# EAGLE board multimax_v1 (EAGLE 6.0)
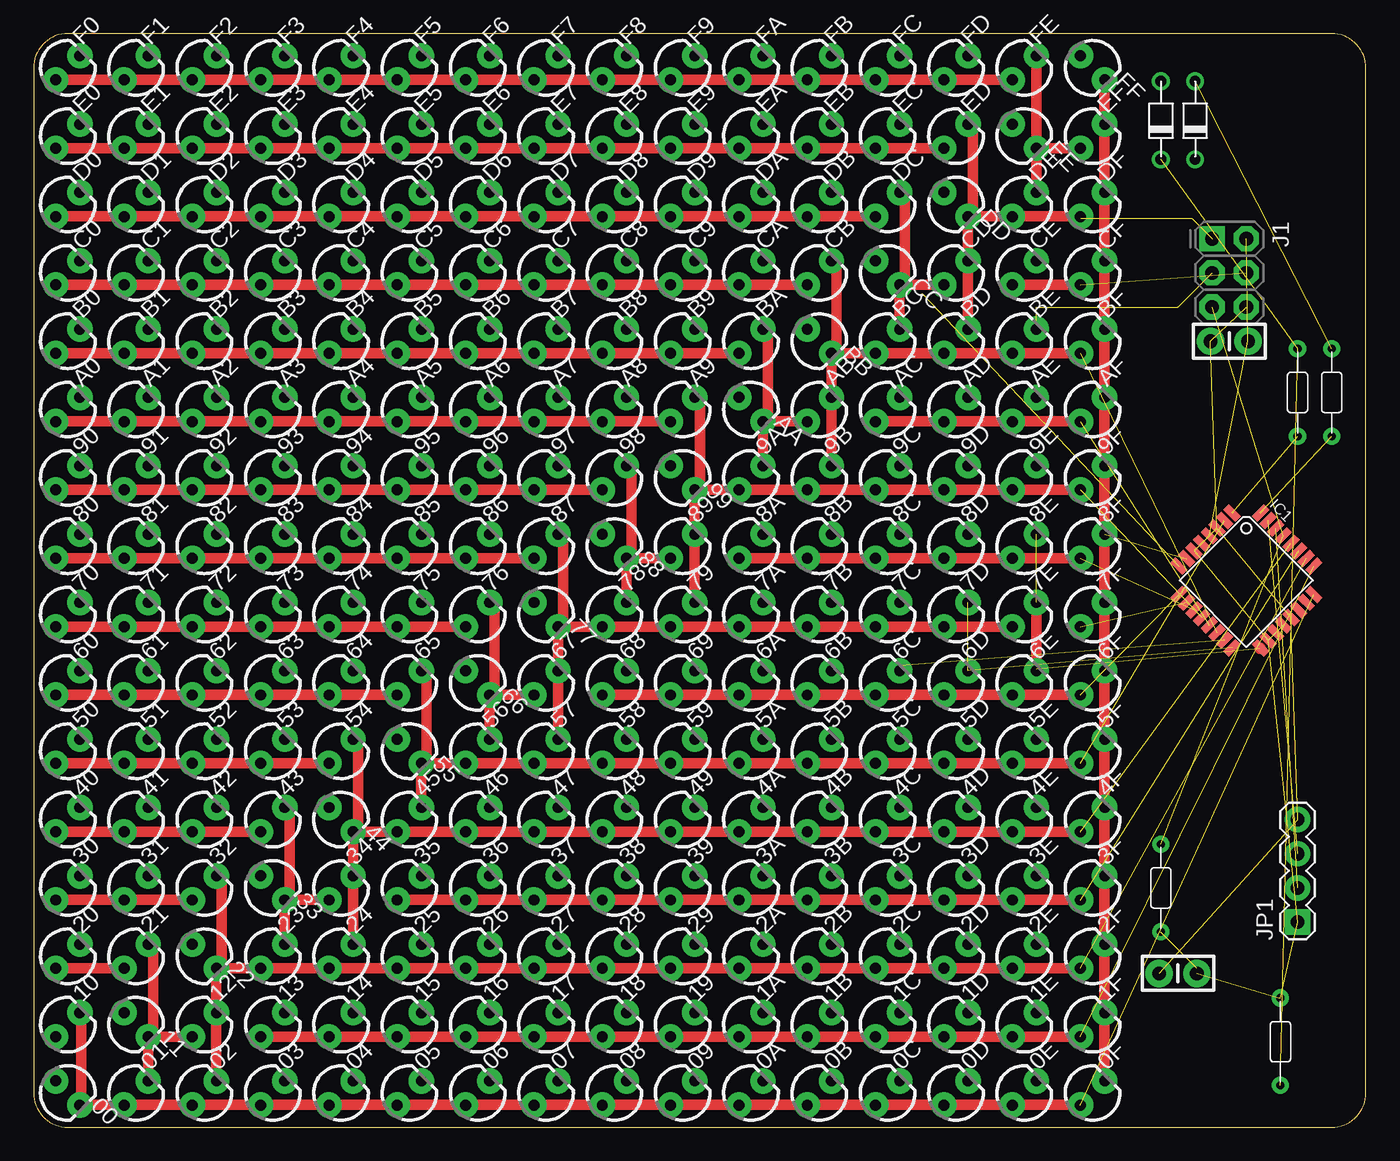
[diagram p0: board, top side]
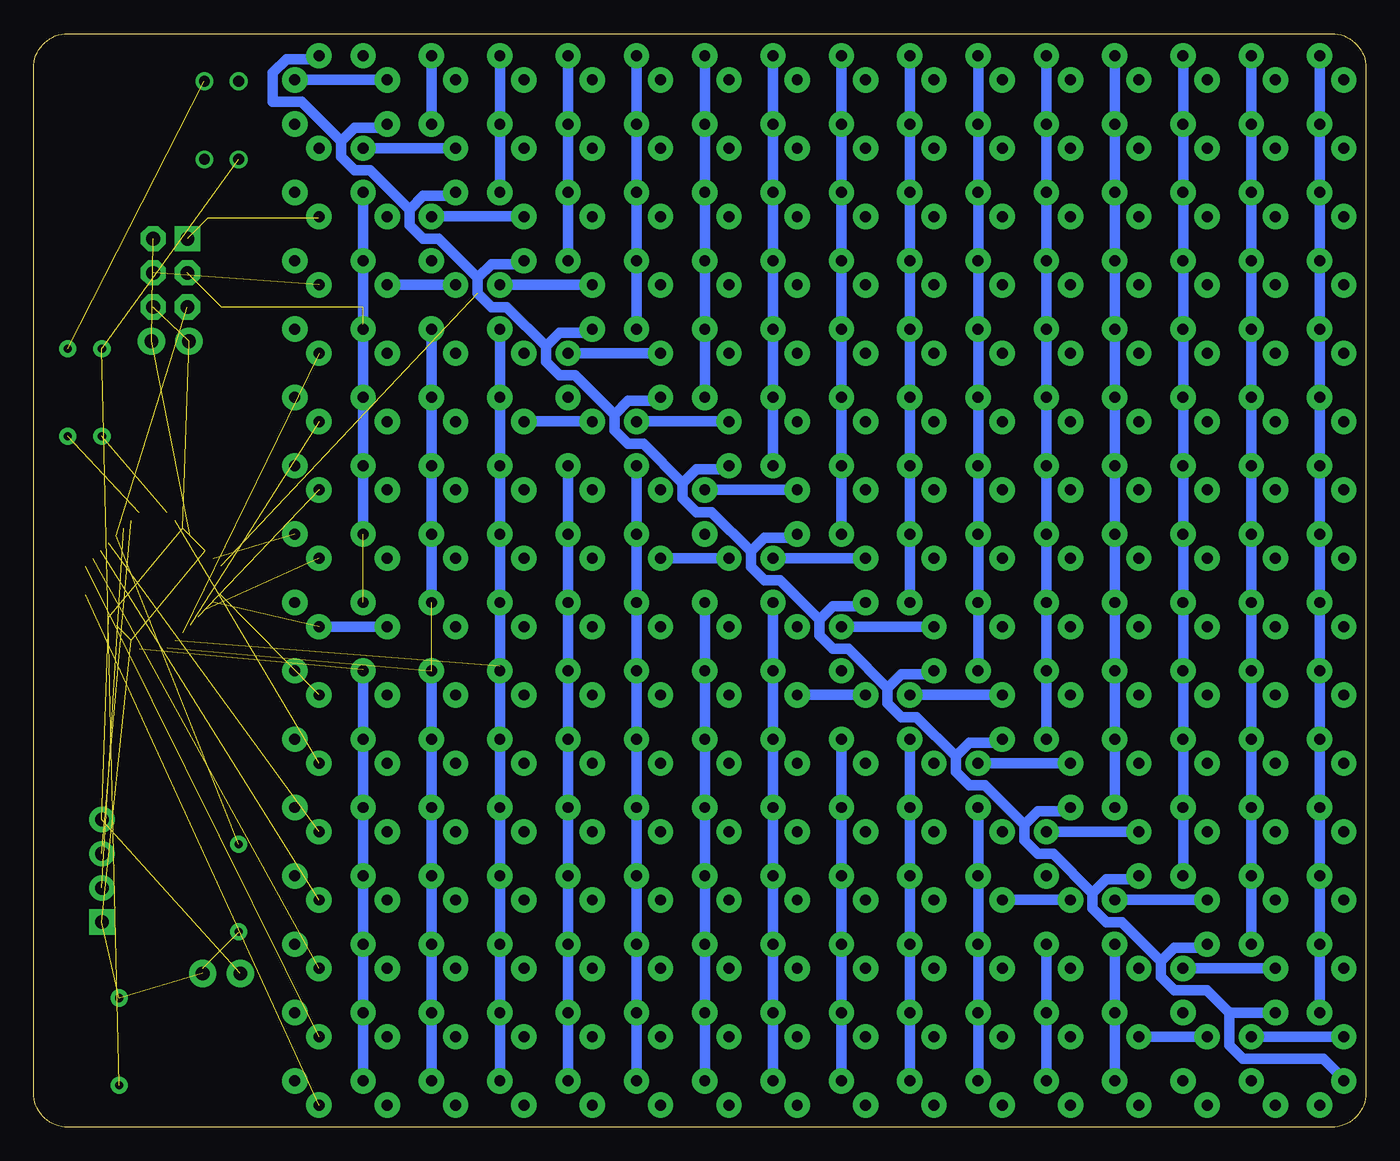
[diagram p1: board, bottom side, seen from below]

Size 99.06 x 81.28 mm. Coordinates in mm from the lower left corner, seen from the top.
Outline: 96.52,81.28 2.54,81.28 arc90 0,78.74 0,2.54 arc90 2.54,0 96.52,0 arc90 99.06,2.54 99.06,78.74 arc90 96.52,81.28
Copper layers (1*16): Top 0.035mm / dielectric 1.5mm / Bottom 0.035mm
Design rules: minimum track width 30mil, minimum drill 24mil, track to track 8mil, track to pad 8mil, pad to pad 8mil, via to via 8mil, smd to smd 8mil, copper to edge 40mil, drill to drill 8mil, minimum pad ring 10mil, minimum via ring 8mil, stop-mask expansion 4mil, vias tented up to drill 0mil, thermal gap 10mil

## Footprints (pad centres in the part's own frame; a part is rotated, then mirrored left to right if it is on the bottom)
LED3MM = drill 0.813 pad 1.88: A -1.27,0; K 1.27,0
CAP-PTH-SMALL-KIT = drill 1.016 pad 2.032: 1 -1.397,0; 2 1.397,0
TQFP32-08 = smd 1.27 x 0.559: 1 -4.293,2.8; 2 -4.293,2; 3 -4.293,1.2; 4 -4.293,0.4; 5 -4.293,-0.4; 6 -4.293,-1.2; 7 -4.293,-2; 8 -4.293,-2.8; 17 4.293,-2.8; 18 4.293,-2; 19 4.293,-1.2; 20 4.293,-0.4; 21 4.293,0.4; 22 4.293,1.2; 23 4.293,2; 24 4.293,2.8 | smd 0.559 x 1.27: 9 -2.8,-4.293; 10 -2,-4.293; 11 -1.2,-4.293; 12 -0.4,-4.293; 13 0.4,-4.293; 14 1.2,-4.293; 15 2,-4.293; 16 2.8,-4.293; 25 2.8,4.293; 26 2,4.293; 27 1.2,4.293; 28 0.4,4.293; 29 -0.4,4.293; 30 -1.2,4.293; 31 -2,4.293; 32 -2.8,4.293
2X3-NS = drill 1.016 pad 1.88 square: 1 -2.54,-1.27 | drill 1.016 pad 1.88 octagon: 2 -2.54,1.27; 3 0,-1.27; 4 0,1.27; 5 2.54,-1.27; 6 2.54,1.27
1X04 = drill 1.016 pad 1.88 square: 1 0,0 | drill 1.016 pad 1.88: 2 2.54,0; 3 5.08,0; 4 7.62,0
R-7 = drill 0.6 pad 1.27: P$1 -3.25,0; P$2 3.25,0
D-7.5 = drill 0.813: A 2.81,0; C -3,0

## Placement (x,y rotation side)
00  [LED3MM]  2.54,2.54 315 top
0A  [LED3MM]  53.34,2.54 45 top
0B  [LED3MM]  58.42,2.54 45 top
0C  [LED3MM]  63.5,2.54 45 top
0D  [LED3MM]  68.58,2.54 45 top
0E  [LED3MM]  73.66,2.54 45 top
0F  [LED3MM]  78.74,2.54 45 top
01  [LED3MM]  7.62,2.54 45 top
1A  [LED3MM]  53.34,7.62 45 top
1B  [LED3MM]  58.42,7.62 45 top
1C  [LED3MM]  63.5,7.62 45 top
1D  [LED3MM]  68.58,7.62 45 top
1E  [LED3MM]  73.66,7.62 45 top
1F  [LED3MM]  78.74,7.62 45 top
02  [LED3MM]  12.7,2.54 45 top
2A  [LED3MM]  53.34,12.7 45 top
2B  [LED3MM]  58.42,12.7 45 top
2C  [LED3MM]  63.5,12.7 45 top
2D  [LED3MM]  68.58,12.7 45 top
2E  [LED3MM]  73.66,12.7 45 top
2F  [LED3MM]  78.74,12.7 45 top
03  [LED3MM]  17.78,2.54 45 top
3A  [LED3MM]  53.34,17.78 45 top
3B  [LED3MM]  58.42,17.78 45 top
3C  [LED3MM]  63.5,17.78 45 top
3D  [LED3MM]  68.58,17.78 45 top
3E  [LED3MM]  73.66,17.78 45 top
3F  [LED3MM]  78.74,17.78 45 top
04  [LED3MM]  22.86,2.54 45 top
4A  [LED3MM]  53.34,22.86 45 top
4B  [LED3MM]  58.42,22.86 45 top
4C  [LED3MM]  63.5,22.86 45 top
4D  [LED3MM]  68.58,22.86 45 top
4E  [LED3MM]  73.66,22.86 45 top
4F  [LED3MM]  78.74,22.86 45 top
05  [LED3MM]  27.94,2.54 45 top
5A  [LED3MM]  53.34,27.94 45 top
5B  [LED3MM]  58.42,27.94 45 top
5C  [LED3MM]  63.5,27.94 45 top
5D  [LED3MM]  68.58,27.94 45 top
5E  [LED3MM]  73.66,27.94 45 top
5F  [LED3MM]  78.74,27.94 45 top
06  [LED3MM]  33.02,2.54 45 top
6A  [LED3MM]  53.34,33.02 45 top
6B  [LED3MM]  58.42,33.02 45 top
6C  [LED3MM]  63.5,33.02 45 top
6D  [LED3MM]  68.58,33.02 45 top
6E  [LED3MM]  73.66,33.02 45 top
6F  [LED3MM]  78.74,33.02 45 top
07  [LED3MM]  38.1,2.54 45 top
7A  [LED3MM]  53.34,38.1 45 top
7B  [LED3MM]  58.42,38.1 45 top
7C  [LED3MM]  63.5,38.1 45 top
7D  [LED3MM]  68.58,38.1 45 top
7E  [LED3MM]  73.66,38.1 45 top
7F  [LED3MM]  78.74,38.1 45 top
08  [LED3MM]  43.18,2.54 45 top
8A  [LED3MM]  53.34,43.18 45 top
8B  [LED3MM]  58.42,43.18 45 top
8C  [LED3MM]  63.5,43.18 45 top
8D  [LED3MM]  68.58,43.18 45 top
8E  [LED3MM]  73.66,43.18 45 top
8F  [LED3MM]  78.74,43.18 45 top
09  [LED3MM]  48.26,2.54 45 top
9A  [LED3MM]  53.34,48.26 45 top
9B  [LED3MM]  58.42,48.26 45 top
9C  [LED3MM]  63.5,48.26 45 top
9D  [LED3MM]  68.58,48.26 45 top
9E  [LED3MM]  73.66,48.26 45 top
9F  [LED3MM]  78.74,48.26 45 top
10  [LED3MM]  2.54,7.62 45 top
11  [LED3MM]  7.62,7.62 315 top
12  [LED3MM]  12.7,7.62 45 top
13  [LED3MM]  17.78,7.62 45 top
14  [LED3MM]  22.86,7.62 45 top
15  [LED3MM]  27.94,7.62 45 top
16  [LED3MM]  33.02,7.62 45 top
17  [LED3MM]  38.1,7.62 45 top
18  [LED3MM]  43.18,7.62 45 top
19  [LED3MM]  48.26,7.62 45 top
20  [LED3MM]  2.54,12.7 45 top
21  [LED3MM]  7.62,12.7 45 top
22  [LED3MM]  12.7,12.7 315 top
23  [LED3MM]  17.78,12.7 45 top
24  [LED3MM]  22.86,12.7 45 top
25  [LED3MM]  27.94,12.7 45 top
26  [LED3MM]  33.02,12.7 45 top
27  [LED3MM]  38.1,12.7 45 top
28  [LED3MM]  43.18,12.7 45 top
29  [LED3MM]  48.26,12.7 45 top
30  [LED3MM]  2.54,17.78 45 top
31  [LED3MM]  7.62,17.78 45 top
32  [LED3MM]  12.7,17.78 45 top
33  [LED3MM]  17.78,17.78 315 top
34  [LED3MM]  22.86,17.78 45 top
35  [LED3MM]  27.94,17.78 45 top
36  [LED3MM]  33.02,17.78 45 top
37  [LED3MM]  38.1,17.78 45 top
38  [LED3MM]  43.18,17.78 45 top
39  [LED3MM]  48.26,17.78 45 top
40  [LED3MM]  2.54,22.86 45 top
41  [LED3MM]  7.62,22.86 45 top
42  [LED3MM]  12.7,22.86 45 top
43  [LED3MM]  17.78,22.86 45 top
44  [LED3MM]  22.86,22.86 315 top
45  [LED3MM]  27.94,22.86 45 top
46  [LED3MM]  33.02,22.86 45 top
47  [LED3MM]  38.1,22.86 45 top
48  [LED3MM]  43.18,22.86 45 top
49  [LED3MM]  48.26,22.86 45 top
50  [LED3MM]  2.54,27.94 45 top
51  [LED3MM]  7.62,27.94 45 top
52  [LED3MM]  12.7,27.94 45 top
53  [LED3MM]  17.78,27.94 45 top
54  [LED3MM]  22.86,27.94 45 top
55  [LED3MM]  27.94,27.94 315 top
56  [LED3MM]  33.02,27.94 45 top
57  [LED3MM]  38.1,27.94 45 top
58  [LED3MM]  43.18,27.94 45 top
59  [LED3MM]  48.26,27.94 45 top
60  [LED3MM]  2.54,33.02 45 top
61  [LED3MM]  7.62,33.02 45 top
62  [LED3MM]  12.7,33.02 45 top
63  [LED3MM]  17.78,33.02 45 top
64  [LED3MM]  22.86,33.02 45 top
65  [LED3MM]  27.94,33.02 45 top
66  [LED3MM]  33.02,33.02 315 top
67  [LED3MM]  38.1,33.02 45 top
68  [LED3MM]  43.18,33.02 45 top
69  [LED3MM]  48.26,33.02 45 top
70  [LED3MM]  2.54,38.1 45 top
71  [LED3MM]  7.62,38.1 45 top
72  [LED3MM]  12.7,38.1 45 top
73  [LED3MM]  17.78,38.1 45 top
74  [LED3MM]  22.86,38.1 45 top
75  [LED3MM]  27.94,38.1 45 top
76  [LED3MM]  33.02,38.1 45 top
77  [LED3MM]  38.1,38.1 315 top
78  [LED3MM]  43.18,38.1 45 top
79  [LED3MM]  48.26,38.1 45 top
80  [LED3MM]  2.54,43.18 45 top
81  [LED3MM]  7.62,43.18 45 top
82  [LED3MM]  12.7,43.18 45 top
83  [LED3MM]  17.78,43.18 45 top
84  [LED3MM]  22.86,43.18 45 top
85  [LED3MM]  27.94,43.18 45 top
86  [LED3MM]  33.02,43.18 45 top
87  [LED3MM]  38.1,43.18 45 top
88  [LED3MM]  43.18,43.18 315 top
89  [LED3MM]  48.26,43.18 45 top
90  [LED3MM]  2.54,48.26 45 top
91  [LED3MM]  7.62,48.26 45 top
92  [LED3MM]  12.7,48.26 45 top
93  [LED3MM]  17.78,48.26 45 top
94  [LED3MM]  22.86,48.26 45 top
95  [LED3MM]  27.94,48.26 45 top
96  [LED3MM]  33.02,48.26 45 top
97  [LED3MM]  38.1,48.26 45 top
98  [LED3MM]  43.18,48.26 45 top
99  [LED3MM]  48.26,48.26 315 top
A0  [LED3MM]  2.54,53.34 45 top
A1  [LED3MM]  7.62,53.34 45 top
A2  [LED3MM]  12.7,53.34 45 top
A3  [LED3MM]  17.78,53.34 45 top
A4  [LED3MM]  22.86,53.34 45 top
A5  [LED3MM]  27.94,53.34 45 top
A6  [LED3MM]  33.02,53.34 45 top
A7  [LED3MM]  38.1,53.34 45 top
A8  [LED3MM]  43.18,53.34 45 top
A9  [LED3MM]  48.26,53.34 45 top
AA  [LED3MM]  53.34,53.34 315 top
AB  [LED3MM]  58.42,53.34 45 top
AC  [LED3MM]  63.5,53.34 45 top
AD  [LED3MM]  68.58,53.34 45 top
AE  [LED3MM]  73.66,53.34 45 top
AF  [LED3MM]  78.74,53.34 45 top
B0  [LED3MM]  2.54,58.42 45 top
B1  [LED3MM]  7.62,58.42 45 top
B2  [LED3MM]  12.7,58.42 45 top
B3  [LED3MM]  17.78,58.42 45 top
B4  [LED3MM]  22.86,58.42 45 top
B5  [LED3MM]  27.94,58.42 45 top
B6  [LED3MM]  33.02,58.42 45 top
B7  [LED3MM]  38.1,58.42 45 top
B8  [LED3MM]  43.18,58.42 45 top
B9  [LED3MM]  48.26,58.42 45 top
BA  [LED3MM]  53.34,58.42 45 top
BB  [LED3MM]  58.42,58.42 315 top
BC  [LED3MM]  63.5,58.42 45 top
BD  [LED3MM]  68.58,58.42 45 top
BE  [LED3MM]  73.66,58.42 45 top
BF  [LED3MM]  78.74,58.42 45 top
C0  [LED3MM]  2.54,63.5 45 top
C1  [LED3MM]  7.62,63.5 45 top
C2  [LED3MM]  12.7,63.5 45 top
C3  [LED3MM]  17.78,63.5 45 top
C4  [LED3MM]  22.86,63.5 45 top
C5  [LED3MM]  27.94,63.5 45 top
C6  [LED3MM]  33.02,63.5 45 top
C7  [LED3MM]  38.1,63.5 45 top
C8  [LED3MM]  43.18,63.5 45 top
C9  [LED3MM]  48.26,63.5 45 top
CA  [LED3MM]  53.34,63.5 45 top
CB  [LED3MM]  58.42,63.5 45 top
CC  [LED3MM]  63.5,63.5 315 top
CD  [LED3MM]  68.58,63.5 45 top
CE  [LED3MM]  73.66,63.5 45 top
CF  [LED3MM]  78.74,63.5 45 top
CP2  [CAP-PTH-SMALL-KIT]  85.09,11.43 180 top
CP4  [CAP-PTH-SMALL-KIT]  88.9,58.42 180 top
D0  [LED3MM]  2.54,68.58 45 top
D1  [LED3MM]  7.62,68.58 45 top
D2  [LED3MM]  12.7,68.58 45 top
D3  [LED3MM]  17.78,68.58 45 top
D4  [LED3MM]  22.86,68.58 45 top
D5  [LED3MM]  27.94,68.58 45 top
D6  [LED3MM]  33.02,68.58 45 top
D7  [LED3MM]  38.1,68.58 45 top
D8  [LED3MM]  43.18,68.58 45 top
D9  [LED3MM]  48.26,68.58 45 top
DA  [LED3MM]  53.34,68.58 45 top
DB  [LED3MM]  58.42,68.58 45 top
DC  [LED3MM]  63.5,68.58 45 top
DD  [LED3MM]  68.58,68.58 315 top
DE  [LED3MM]  73.66,68.58 45 top
DF  [LED3MM]  78.74,68.58 45 top
E0  [LED3MM]  2.54,73.66 45 top
E1  [LED3MM]  7.62,73.66 45 top
E2  [LED3MM]  12.7,73.66 45 top
E3  [LED3MM]  17.78,73.66 45 top
E4  [LED3MM]  22.86,73.66 45 top
E5  [LED3MM]  27.94,73.66 45 top
E6  [LED3MM]  33.02,73.66 45 top
E7  [LED3MM]  38.1,73.66 45 top
E8  [LED3MM]  43.18,73.66 45 top
E9  [LED3MM]  48.26,73.66 45 top
EA  [LED3MM]  53.34,73.66 45 top
EB  [LED3MM]  58.42,73.66 45 top
EC  [LED3MM]  63.5,73.66 45 top
ED  [LED3MM]  68.58,73.66 45 top
EE  [LED3MM]  73.66,73.66 315 top
EF  [LED3MM]  78.74,73.66 45 top
F0  [LED3MM]  2.54,78.74 45 top
F1  [LED3MM]  7.62,78.74 45 top
F2  [LED3MM]  12.7,78.74 45 top
F3  [LED3MM]  17.78,78.74 45 top
F4  [LED3MM]  22.86,78.74 45 top
F5  [LED3MM]  27.94,78.74 45 top
F6  [LED3MM]  33.02,78.74 45 top
F7  [LED3MM]  38.1,78.74 45 top
F8  [LED3MM]  43.18,78.74 45 top
F9  [LED3MM]  48.26,78.74 45 top
FA  [LED3MM]  53.34,78.74 45 top
FB  [LED3MM]  58.42,78.74 45 top
FC  [LED3MM]  63.5,78.74 45 top
FD  [LED3MM]  68.58,78.74 45 top
FE  [LED3MM]  73.66,78.74 45 top
FF  [LED3MM]  78.74,78.74 315 top
IC1  MEGA8-AI  [TQFP32-08]  90.17,40.64 315 top
J1  AVR_SPI_PRG_6NS  [2X3-NS]  88.9,63.5 270 top
JP1  [1X04]  93.98,15.24 90 top
U$2  R-7  [R-7]  83.82,17.78 90 top
U$3  R-7  [R-7]  96.52,54.61 90 top
U$4  R-7  [R-7]  93.98,54.61 90 top
U$5  D-6  [D-7.5]  86.36,74.93 90 top
U$6  D-6  [D-7.5]  83.82,74.93 90 top
U$7  R-7  [R-7]  92.71,6.35 90 top

## Library data of the parts
00 0A 0B 0C 0D 0E 0F 01 1A 1B 1C 1D 1E 1F 02 2A 2B 2C 2D 2E 2F 03 3A 3B 3C 3D 3E 3F 04 4A 4B 4C 4D 4E 4F 05 5A 5B 5C 5D 5E 5F 06 6A 6B 6C 6D 6E 6F 07 7A 7B 7C 7D 7E 7F 08 8A 8B 8C 8D 8E 8F 09 9A 9B 9C 9D 9E 9F 10-99 A0 A1-A9 AA AB AC AD AE AF B0 B1-B9 BA BB BC BD BE BF C0 C1-C9 CA CB CC CD CE CF D0 D1-D9 DA DB DC DD DE DF E0 E1-E9 EA EB EC ED EE EF F0 F1-F9 FA FB FC FD FE FF = SparkFun-LED
CP2 CP4 = SparkFun-Capacitors
IC1 = atmel; MPN: ATMEGA8-16AU; OC_FARNELL: 9171371; OC_NEWARK: 73M8863
J1 JP1 = SparkFun-Connectors
U$2-U$7 = Mrule

## Nets
D: 00.A 11.A 22.A 33.A 44.A 55.A 66.A 77.A 88.A 99.A AA.A BB.A CC.A DD.A EE.A FF.A IC1.8
GND: CP2.2 CP4.2 IC1.3 IC1.5 IC1.21 J1.6 JP1.4
N$1: IC1.31 JP1.3
N$2: IC1.30 JP1.2
N$3: IC1.29 J1.5 U$2.P$2
N$5: 0D.K 1D.K 2D.K 3D.K 4D.K 5D.K 6D.K 7D.K 8D.K 9D.K AD.K BD.K CD.K D0.A D1.A D2.A D3.A D4.A D5.A D6.A D7.A D8.A D9.A DA.A DB.A DC.A DD.K DE.A DF.A ED.K FD.K IC1.16 J1.1
N$8: IC1.1 U$4.P$1
N$9: IC1.32 U$3.P$1
N$10: 0F.K 1F.K 2F.K 3F.K 4F.K 5F.K 6F.K 7F.K 8F.K 9F.K AF.K BF.K CF.K DF.K EF.K F0.A F1.A F2.A F3.A F4.A F5.A F6.A F7.A F8.A F9.A FA.A FB.A FC.A FD.A FE.A FF.K IC1.7
N$11: 0B.K 1B.K 2B.K 3B.K 4B.K 5B.K 6B.K 7B.K 8B.K 9B.K AB.K B0.A B1.A B2.A B3.A B4.A B5.A B6.A B7.A B8.A B9.A BA.A BB.K BC.A BD.A BE.A BF.A CB.K DB.K EB.K FB.K IC1.14
N$13: 09.K 9A.A 9B.A 9C.A 9D.A 9E.A 9F.A 19.K 29.K 39.K 49.K 59.K 69.K 79.K 89.K 90.A 91.A 92.A 93.A 94.A 95.A 96.A 97.A 98.A 99.K A9.K B9.K C9.K D9.K E9.K F9.K IC1.12
N$15: 07.K 7A.A 7B.A 7C.A 7D.A 7E.A 7F.A 17.K 27.K 37.K 47.K 57.K 67.K 70.A 71.A 72.A 73.A 74.A 75.A 76.A 77.K 78.A 79.A 87.K 97.K A7.K B7.K C7.K D7.K E7.K F7.K IC1.10
N$18: 04.K 4A.A 4B.A 4C.A 4D.A 4E.A 4F.A 14.K 24.K 34.K 40.A 41.A 42.A 43.A 44.K 45.A 46.A 47.A 48.A 49.A 54.K 64.K 74.K 84.K 94.K A4.K B4.K C4.K D4.K E4.K F4.K IC1.28
N$20: 02.K 2A.A 2B.A 2C.A 2D.A 2E.A 2F.A 12.K 20.A 21.A 22.K 23.A 24.A 25.A 26.A 27.A 28.A 29.A 32.K 42.K 52.K 62.K 72.K 82.K 92.K A2.K B2.K C2.K D2.K E2.K F2.K IC1.26
N$23: U$5.C
N$24: U$6.A
N$25: U$3.P$2 U$5.A
N$26: U$4.P$2 U$6.C U$7.P$1
S0: 00.K 0A.A 0B.A 0C.A 0D.A 0E.A 0F.A 01.A 02.A 03.A 04.A 05.A 06.A 07.A 08.A 09.A 10.K 20.K 30.K 40.K 50.K 60.K 70.K 80.K 90.K A0.K B0.K C0.K D0.K E0.K F0.K IC1.24
S1: 01.K 1A.A 1B.A 1C.A 1D.A 1E.A 1F.A 10.A 11.K 12.A 13.A 14.A 15.A 16.A 17.A 18.A 19.A 21.K 31.K 41.K 51.K 61.K 71.K 81.K 91.K A1.K B1.K C1.K D1.K E1.K F1.K IC1.25
S3: 03.K 3A.A 3B.A 3C.A 3D.A 3E.A 3F.A 13.K 23.K 30.A 31.A 32.A 33.K 34.A 35.A 36.A 37.A 38.A 39.A 43.K 53.K 63.K 73.K 83.K 93.K A3.K B3.K C3.K D3.K E3.K F3.K IC1.27
S5: 05.K 5A.A 5B.A 5C.A 5D.A 5E.A 5F.A 15.K 25.K 35.K 45.K 50.A 51.A 52.A 53.A 54.A 55.K 56.A 57.A 58.A 59.A 65.K 75.K 85.K 95.K A5.K B5.K C5.K D5.K E5.K F5.K IC1.2
S6: 06.K 6A.A 6B.A 6C.A 6D.A 6E.A 6F.A 16.K 26.K 36.K 46.K 56.K 60.A 61.A 62.A 63.A 64.A 65.A 66.K 67.A 68.A 69.A 76.K 86.K 96.K A6.K B6.K C6.K D6.K E6.K F6.K IC1.9
S8: 08.K 8A.A 8B.A 8C.A 8D.A 8E.A 8F.A 18.K 28.K 38.K 48.K 58.K 68.K 78.K 80.A 81.A 82.A 83.A 84.A 85.A 86.A 87.A 88.K 89.A 98.K A8.K B8.K C8.K D8.K E8.K F8.K IC1.11
S10: 0A.K 1A.K 2A.K 3A.K 4A.K 5A.K 6A.K 7A.K 8A.K 9A.K A0.A A1.A A2.A A3.A A4.A A5.A A6.A A7.A A8.A A9.A AA.K AB.A AC.A AD.A AE.A AF.A BA.K CA.K DA.K EA.K FA.K IC1.13
S12: 0C.K 1C.K 2C.K 3C.K 4C.K 5C.K 6C.K 7C.K 8C.K 9C.K AC.K BC.K C0.A C1.A C2.A C3.A C4.A C5.A C6.A C7.A C8.A C9.A CA.A CB.A CC.K CD.A CE.A CF.A DC.K EC.K FC.K IC1.15 J1.4
S14: 0E.K 1E.K 2E.K 3E.K 4E.K 5E.K 6E.K 7E.K 8E.K 9E.K AE.K BE.K CE.K DE.K E0.A E1.A E2.A E3.A E4.A E5.A E6.A E7.A E8.A E9.A EA.A EB.A EC.A ED.A EE.K EF.A FE.K IC1.17 J1.3
VCC: CP2.1 CP4.1 IC1.4 IC1.6 IC1.18 IC1.20 J1.2 JP1.1 U$2.P$1 U$7.P$2

## Tracks (layer width: path | path; a pad name or v marks a point on that pad's centre or on a via)
D  (1 unrouted)
  Bottom 0.762: 10.16,8.51 10.16,6.1 9.14,5.08 3.17,5.08 1.65,3.56 00.A | 10.16,8.51 11.A | 15.24,12.32 14.22,13.34 12.06,13.34 22.A | 15.24,12.32 15.24,11.18 14.22,10.16 11.81,10.16 10.16,8.51 | 20.32,17.4 19.3,18.41 17.14,18.41 33.A | 20.32,17.4 20.32,16.26 19.3,15.24 18.16,15.24 15.24,12.32 | 25.4,22.48 24.38,23.5 22.23,23.5 21.97,23.75 44.A | 25.4,22.48 25.4,21.34 24.38,20.32 23.24,20.32 20.32,17.4 | 30.48,27.56 29.46,28.57 27.3,28.57 55.A | 30.48,27.56 30.48,26.42 29.46,25.4 28.32,25.4 25.4,22.48 | 35.56,32.64 34.54,33.66 32.38,33.66 32.13,33.91 66.A | 35.56,32.64 35.56,31.5 34.54,30.48 33.4,30.48 30.48,27.56 | 40.64,37.72 39.62,38.73 37.47,38.73 37.21,38.99 77.A | 40.64,37.72 40.64,36.58 39.62,35.56 38.48,35.56 35.56,32.64 | 45.72,42.8 44.7,43.81 42.55,43.81 88.A | 45.72,42.8 45.72,41.66 44.7,40.64 43.56,40.64 40.64,37.72 | 50.8,47.88 49.78,48.9 47.62,48.9 47.37,49.15 99.A | 50.8,47.88 50.8,46.74 49.78,45.72 48.64,45.72 45.72,42.8 | 55.88,52.96 54.86,53.98 52.7,53.98 52.45,54.23 AA.A | 55.88,52.96 55.88,51.82 54.86,50.8 53.72,50.8 50.8,47.88 | 60.96,58.04 59.94,59.05 57.78,59.05 57.53,59.31 BB.A | 60.96,58.04 60.96,56.9 59.94,55.88 58.8,55.88 55.88,52.96 | 66.04,63.12 65.02,64.14 62.87,64.14 62.61,64.39 CC.A | 66.04,63.12 66.04,61.98 65.02,60.96 63.88,60.96 60.96,58.04 | 71.12,68.2 70.1,69.22 67.94,69.22 67.69,69.47 DD.A | 71.12,68.2 71.12,67.06 70.1,66.04 68.96,66.04 66.04,63.12 | 76.2,73.28 75.18,74.3 73.03,74.3 72.77,74.55 EE.A | 76.2,73.28 76.2,72.14 75.18,71.12 74.04,71.12 71.12,68.2 | 76.2,73.28 79.12,76.2 81.28,76.2 81.28,78.36 80.26,79.38 78.11,79.38 FF.A
GND  (6 unrouted)
N$1  (1 unrouted)
N$2  (1 unrouted)
N$3  (2 unrouted)
N$5  (4 unrouted)
  Top 0.762: D0.A 1.65,67.69 6.6,67.69 D1.A 6.99,67.69 11.68,67.69 D2.A 12.06,67.69 16.76,67.69 D3.A 17.14,67.69 21.84,67.69 D4.A 22.23,67.69 26.92,67.69 D5.A 27.3,67.69 32,67.69 D6.A 32.38,67.69 37.08,67.69 D7.A 37.47,67.69 42.16,67.69 D8.A 42.55,67.69 47.24,67.69 D9.A 47.62,67.69 52.32,67.69 DA.A 52.7,67.69 57.4,67.69 DB.A 57.78,67.69 62.48,67.69 DC.A | DD.K 69.47,67.56 69.47,64.52 CD.K 69.47,64.14 69.47,59.44 BD.K | DD.K 69.85,67.69 72.64,67.69 DE.A 73.03,67.69 77.72,67.69 DF.A | ED.K 69.6,74.55 69.85,74.3 69.85,68.07 DD.K
  Bottom 0.762: ED.K 69.47,74.68 69.47,79.63 FD.K | 77.85,67.56 DF.A | 0D.K 69.47,3.56 69.47,8.51 1D.K 69.47,8.89 69.47,13.59 2D.K 69.47,13.97 69.47,18.67 3D.K 69.47,19.05 69.47,23.75 4D.K 69.47,24.13 69.47,28.57 5D.K 69.47,28.96 69.47,33.66 6D.K | 7D.K 69.47,39.37 69.47,44.07 8D.K 69.47,44.45 69.47,49.15 9D.K 69.47,49.53 69.47,54.23 AD.K 69.47,54.61 69.47,59.31 BD.K | DC.A 62.61,67.69 69.47,67.69 DD.K
N$8  (1 unrouted)
N$9  (1 unrouted)
N$10  (1 unrouted)
  Top 0.762: F0.A 1.65,77.85 6.6,77.85 F1.A 6.99,77.85 11.68,77.85 F2.A 12.06,77.85 16.76,77.85 F3.A 17.14,77.85 21.84,77.85 F4.A 22.23,77.85 26.92,77.85 F5.A 27.3,77.85 32,77.85 F6.A 32.38,77.85 37.08,77.85 F7.A 37.47,77.85 42.16,77.85 F8.A 42.55,77.85 47.24,77.85 F9.A 47.62,77.85 52.32,77.85 FA.A 52.7,77.85 57.4,77.85 FB.A 57.78,77.85 62.48,77.85 FC.A 62.87,77.85 67.56,77.85 FD.A 67.94,77.85 72.64,77.85 FE.A | FF.K 79.63,77.72 79.63,74.68 EF.K 79.63,74.3 79.63,69.85 DF.K 79.63,69.47 79.63,64.77 CF.K 79.63,64.39 79.63,59.69 BF.K 79.63,59.31 79.63,54.61 AF.K 79.63,54.23 79.63,49.53 9F.K 79.63,44.45 8F.K 79.63,39.37 7F.K 79.63,38.99 79.63,34.29 6F.K 79.63,33.91 79.63,29.21 5F.K 79.63,24.13 4F.K 79.63,23.75 79.63,19.05 3F.K 79.63,13.97 2F.K 79.63,8.89 1F.K 79.63,3.56 0F.K
  Bottom 0.762: FE.A 72.77,77.85 FF.K
N$11  (1 unrouted)
  Top 0.762: B0.A 1.65,57.53 6.6,57.53 B1.A 6.99,57.53 11.68,57.53 B2.A 12.06,57.53 16.76,57.53 B3.A 17.14,57.53 21.84,57.53 B4.A 22.23,57.53 26.92,57.53 B5.A 27.3,57.53 32,57.53 B6.A 32.38,57.53 37.08,57.53 B7.A 37.47,57.53 42.16,57.53 B8.A 42.55,57.53 47.24,57.53 B9.A 47.62,57.53 52.32,57.53 BA.A | BB.K 59.31,57.4 59.31,54.36 AB.K 59.31,53.98 59.31,49.28 9B.K | BB.K 59.69,57.53 62.48,57.53 BC.A 62.87,57.53 67.56,57.53 BD.A 67.94,57.53 72.64,57.53 BE.A 73.03,57.53 77.72,57.53 BF.A | CB.K 59.44,64.39 59.69,64.14 59.69,57.91 BB.K
  Bottom 0.762: CB.K 59.31,64.52 59.31,69.47 DB.K 59.31,69.85 59.31,74.55 EB.K 59.31,74.93 59.31,79.63 FB.K | 0B.K 59.31,3.56 59.31,8.51 1B.K 59.31,8.89 59.31,13.59 2B.K 59.31,13.97 59.31,18.67 3B.K 59.31,19.05 59.31,23.75 4B.K 59.31,24.13 59.31,28.83 5B.K 59.31,29.21 59.31,33.91 6B.K 59.31,34.29 59.31,38.99 7B.K 59.31,39.37 59.31,44.07 8B.K 59.31,44.45 59.31,49.15 9B.K | BA.A 52.45,57.53 59.31,57.53 BB.K
N$13  (1 unrouted)
  Top 0.762: 90.A 1.65,47.37 6.6,47.37 91.A 6.99,47.37 11.68,47.37 92.A 12.06,47.37 16.76,47.37 93.A 17.14,47.37 21.84,47.37 94.A 22.23,47.37 26.92,47.37 95.A 27.3,47.37 32,47.37 96.A 32.38,47.37 37.08,47.37 97.A 37.47,47.37 42.16,47.37 98.A | 99.K 49.15,47.24 49.15,44.2 89.K 49.15,43.81 49.15,39.12 79.K | 99.K 49.53,47.37 52.32,47.37 9A.A 52.7,47.37 57.4,47.37 9B.A 57.78,47.37 62.48,47.37 9C.A 62.87,47.37 67.56,47.37 9D.A 67.94,47.37 72.64,47.37 9E.A 73.03,47.37 77.72,47.37 9F.A | A9.K 49.28,54.23 49.53,53.98 49.53,47.75 99.K
  Bottom 0.762: 09.K 49.15,3.56 19.K 49.15,8.89 29.K 49.15,13.97 39.K 49.15,19.05 49.15,23.75 49.K 49.15,24.13 59.K 49.15,29.21 49.15,33.91 69.K 49.15,34.29 49.15,38.99 79.K | A9.K 49.15,54.36 49.15,59.31 B9.K 49.15,59.69 49.15,64.39 C9.K 49.15,64.77 49.15,69.47 D9.K 49.15,69.85 E9.K 49.15,74.93 F9.K | 98.A 42.29,47.37 49.15,47.37 99.K
N$15  (1 unrouted)
  Top 0.762: 70.A 1.65,37.21 6.6,37.21 71.A 6.99,37.21 11.68,37.21 72.A 12.06,37.21 16.76,37.21 73.A 17.14,37.21 21.84,37.21 74.A 22.23,37.21 26.92,37.21 75.A 27.3,37.21 32,37.21 76.A | 77.K 38.99,37.08 38.99,34.04 67.K 38.99,33.66 38.99,28.96 57.K | 77.K 39.37,37.21 42.16,37.21 78.A 42.55,37.21 47.24,37.21 79.A 47.62,37.21 52.32,37.21 7A.A 52.7,37.21 57.4,37.21 7B.A 57.78,37.21 62.48,37.21 7C.A 62.87,37.21 67.56,37.21 7D.A 67.94,37.21 72.64,37.21 7E.A | 87.K 39.12,44.07 39.37,43.81 39.37,37.59 77.K
  Bottom 0.762: 87.K 38.99,44.2 38.99,49.15 97.K 38.99,49.53 38.99,54.23 A7.K 38.99,54.61 38.99,59.31 B7.K 38.99,59.69 38.99,64.39 C7.K 38.99,64.77 38.99,69.47 D7.K 38.99,69.85 38.99,74.55 E7.K 38.99,74.93 38.99,79.63 F7.K | 07.K 38.99,3.56 38.99,8.51 17.K 38.99,8.89 38.99,13.59 27.K 38.99,13.97 38.99,18.67 37.K 38.99,19.05 38.99,23.75 47.K 38.99,24.13 38.99,28.83 57.K | 7F.A 77.72,37.21 72.77,37.21 7E.A | 76.A 38.99,37.21 77.K
N$18  (1 unrouted)
  Top 0.762: 40.A 1.65,21.97 6.6,21.97 41.A 6.99,21.97 11.68,21.97 42.A 12.06,21.97 16.76,21.97 43.A | 44.K 23.75,21.84 23.75,18.8 34.K 23.75,18.41 23.75,13.72 24.K | 44.K 24.13,21.97 26.92,21.97 45.A 27.3,21.97 32,21.97 46.A 32.38,21.97 37.08,21.97 47.A 37.47,21.97 42.16,21.97 48.A 42.55,21.97 47.24,21.97 49.A 47.62,21.97 52.32,21.97 4A.A 52.7,21.97 57.4,21.97 4B.A 57.78,21.97 62.48,21.97 4C.A 62.87,21.97 67.56,21.97 4D.A 67.94,21.97 72.64,21.97 4E.A 73.03,21.97 77.72,21.97 4F.A | 54.K 23.88,28.83 24.13,28.57 24.13,22.35 44.K
  Bottom 0.762: 54.K 23.75,28.96 23.75,33.91 64.K 23.75,34.29 23.75,38.99 74.K 23.75,39.37 23.75,44.07 84.K 23.75,44.45 23.75,49.15 94.K 23.75,49.53 23.75,54.23 A4.K 23.75,54.61 23.75,59.31 B4.K 23.75,59.69 23.75,64.39 C4.K 23.75,64.77 23.75,69.47 D4.K 23.75,69.85 23.75,74.55 E4.K 23.75,74.93 23.75,79.63 F4.K | 04.K 23.75,3.56 23.75,8.51 14.K 23.75,8.89 23.75,13.59 24.K | 43.A 44.K
N$20  (1 unrouted)
  Top 0.762: 20.A 1.65,11.81 6.6,11.81 21.A | 02.K 13.59,3.56 12.K 13.59,8.89 13.59,11.68 22.K | 22.K 13.97,11.81 16.76,11.81 23.A 17.14,11.81 21.84,11.81 24.A 22.23,11.81 26.92,11.81 25.A 27.3,11.81 32,11.81 26.A 32.38,11.81 37.08,11.81 27.A 37.47,11.81 42.16,11.81 28.A 42.55,11.81 47.24,11.81 29.A 47.62,11.81 52.32,11.81 2A.A 52.7,11.81 57.4,11.81 2B.A 57.78,11.81 62.48,11.81 2C.A 62.87,11.81 67.56,11.81 2D.A 67.94,11.81 72.64,11.81 2E.A 73.03,11.81 77.72,11.81 2F.A | 32.K 13.72,18.67 13.97,18.41 13.97,12.19 22.K
  Bottom 0.762: 32.K 13.59,18.8 13.59,23.75 42.K 13.59,24.13 52.K 13.59,29.21 13.59,33.91 62.K 13.59,34.29 13.59,38.99 72.K 13.59,39.37 82.K 13.59,44.45 92.K 13.59,49.53 13.59,54.23 A2.K 13.59,54.61 13.59,59.31 B2.K 13.59,59.69 13.59,64.39 C2.K 13.59,64.77 13.59,69.47 D2.K 13.59,69.85 E2.K 13.59,74.93 F2.K | 21.A 22.K
N$25  (1 unrouted)
N$26  (2 unrouted)
S0  (1 unrouted)
  Top 0.762: 0F.A 77.47,1.65 72.77,1.65 0E.A 72.39,1.65 67.94,1.65 0D.A 67.56,1.65 62.87,1.65 0C.A 62.48,1.65 57.78,1.65 0B.A 57.4,1.65 52.7,1.65 0A.A 52.32,1.65 47.62,1.65 09.A 47.24,1.65 42.55,1.65 08.A 42.16,1.65 37.47,1.65 07.A 37.08,1.65 32.38,1.65 06.A 32,1.65 27.3,1.65 05.A 26.92,1.65 22.23,1.65 04.A 21.84,1.65 17.14,1.65 03.A 16.76,1.65 12.06,1.65 02.A 11.68,1.65 6.99,1.65 01.A 6.6,1.65 3.56,1.65 00.K 3.56,2.03 3.56,8.51 10.K
  Bottom 0.762: 10.K 3.43,8.64 3.43,13.59 20.K 3.43,13.97 3.43,18.67 30.K 3.43,19.05 3.43,23.75 40.K 3.43,24.13 3.43,28.83 50.K 3.43,29.21 3.43,33.91 60.K 3.43,34.29 3.43,38.99 70.K 3.43,39.37 3.43,44.07 80.K 3.43,44.45 3.43,49.15 90.K 3.43,49.53 3.43,54.23 A0.K 3.43,54.61 3.43,59.31 B0.K 3.43,59.69 3.43,64.39 C0.K 3.43,64.77 3.43,69.47 D0.K 3.43,69.85 3.43,74.55 E0.K 3.43,74.93 3.43,79.63 F0.K
S1  (1 unrouted)
  Top 0.762: 01.K 8.51,3.56 8.51,6.6 11.K | 12.A 11.68,6.73 8.89,6.73 11.K | 13.A 21.84,6.73 14.A 22.23,6.73 26.92,6.73 15.A 27.3,6.73 32,6.73 16.A 32.38,6.73 37.08,6.73 17.A 37.47,6.73 42.16,6.73 18.A 42.55,6.73 47.24,6.73 19.A 47.62,6.73 52.32,6.73 1A.A 52.7,6.73 57.4,6.73 1B.A 57.78,6.73 62.48,6.73 1C.A 62.87,6.73 67.56,6.73 1D.A 67.94,6.73 72.64,6.73 1E.A 73.03,6.73 77.72,6.73 1F.A | 21.K 8.64,13.59 8.89,13.34 8.89,7.11 11.K
  Bottom 0.762: 21.K 8.51,13.72 31.K 8.51,19.05 8.51,23.75 41.K 8.51,24.13 51.K 8.51,29.21 8.51,33.91 61.K 8.51,34.29 8.51,38.99 71.K 8.51,39.37 81.K 8.51,44.45 91.K 8.51,49.53 8.51,54.23 A1.K 8.51,54.61 8.51,59.31 B1.K 8.51,59.69 8.51,64.39 C1.K 8.51,64.77 8.51,69.47 D1.K 8.51,69.85 E1.K 8.51,74.93 F1.K | 10.A 1.65,6.73 11.K | 12.A 16.76,6.73 13.A
S3  (1 unrouted)
  Top 0.762: 30.A 1.65,16.89 6.6,16.89 31.A 6.99,16.89 11.68,16.89 32.A | 23.K 18.67,13.72 18.67,16.76 33.K | 34.A 21.84,16.89 19.05,16.89 33.K | 35.A 32,16.89 36.A 32.38,16.89 37.08,16.89 37.A 37.47,16.89 42.16,16.89 38.A 42.55,16.89 47.24,16.89 39.A 47.62,16.89 52.32,16.89 3A.A 52.7,16.89 57.4,16.89 3B.A 57.78,16.89 62.48,16.89 3C.A 62.87,16.89 67.56,16.89 3D.A 67.94,16.89 72.64,16.89 3E.A 73.03,16.89 77.72,16.89 3F.A | 43.K 18.8,23.75 19.05,23.5 19.05,17.27 33.K
  Bottom 0.762: 43.K 18.67,23.88 53.K 18.67,29.21 18.67,33.91 63.K 18.67,34.29 18.67,38.99 73.K 18.67,39.37 83.K 18.67,44.45 93.K 18.67,49.53 18.67,54.23 A3.K 18.67,54.61 18.67,59.31 B3.K 18.67,59.69 18.67,64.39 C3.K 18.67,64.77 18.67,69.47 D3.K 18.67,69.85 E3.K 18.67,74.93 F3.K | 03.K 18.67,3.56 13.K 18.67,8.89 23.K | 32.A 33.K | 34.A 26.92,16.89 35.A
S5  (1 unrouted)
  Top 0.762: 50.A 1.65,27.05 6.6,27.05 51.A 6.99,27.05 11.68,27.05 52.A 12.06,27.05 16.76,27.05 53.A 17.14,27.05 21.84,27.05 54.A | 45.K 28.83,23.88 28.83,26.92 55.K | 55.K 29.21,27.05 32,27.05 56.A 32.38,27.05 37.08,27.05 57.A 37.47,27.05 42.16,27.05 58.A 42.55,27.05 47.24,27.05 59.A 47.62,27.05 52.32,27.05 5A.A 52.7,27.05 57.4,27.05 5B.A 57.78,27.05 62.48,27.05 5C.A 62.87,27.05 67.56,27.05 5D.A 67.94,27.05 72.64,27.05 5E.A 73.03,27.05 77.72,27.05 5F.A | 65.K 28.96,33.91 29.21,33.66 29.21,27.43 55.K
  Bottom 0.762: 65.K 28.83,34.04 28.83,38.99 75.K 28.83,39.37 85.K 28.83,44.45 95.K 28.83,49.53 28.83,54.23 A5.K 28.83,54.61 28.83,59.31 B5.K 28.83,59.69 28.83,64.39 C5.K 28.83,64.77 28.83,69.47 D5.K 28.83,69.85 E5.K 28.83,74.93 F5.K | 05.K 28.83,3.56 15.K 28.83,8.89 25.K 28.83,13.97 35.K 28.83,19.05 28.83,23.75 45.K | 54.A 55.K
S6  (1 unrouted)
  Top 0.762: 68.A 47.24,32.13 69.A 47.62,32.13 52.32,32.13 6A.A 52.7,32.13 57.4,32.13 6B.A 57.78,32.13 62.48,32.13 6C.A 62.87,32.13 67.56,32.13 6D.A 67.94,32.13 72.64,32.13 6E.A 73.03,32.13 77.72,32.13 6F.A | 60.A 1.65,32.13 6.6,32.13 61.A 6.99,32.13 11.68,32.13 62.A 12.06,32.13 16.76,32.13 63.A 17.14,32.13 21.84,32.13 64.A 22.23,32.13 26.92,32.13 65.A | 56.K 33.91,28.96 33.91,32 66.K | 67.A 37.08,32.13 34.29,32.13 66.K | 76.K 34.04,38.99 34.29,38.73 34.29,32.51 66.K
  Bottom 0.762: 76.K 33.91,39.12 33.91,44.07 86.K 33.91,44.45 33.91,49.15 96.K 33.91,49.53 33.91,54.23 A6.K 33.91,54.61 33.91,59.31 B6.K 33.91,59.69 33.91,64.39 C6.K 33.91,64.77 33.91,69.47 D6.K 33.91,69.85 33.91,74.55 E6.K 33.91,74.93 33.91,79.63 F6.K | 06.K 33.91,3.56 33.91,8.51 16.K 33.91,8.89 33.91,13.59 26.K 33.91,13.97 33.91,18.67 36.K 33.91,19.05 33.91,23.75 46.K 33.91,24.13 33.91,28.83 56.K | 65.A 33.91,32.13 66.K | 68.A 42.16,32.13 67.A
S8  (1 unrouted)
  Top 0.762: 80.A 1.65,42.29 6.6,42.29 81.A 6.99,42.29 11.68,42.29 82.A 12.06,42.29 16.76,42.29 83.A 17.14,42.29 21.84,42.29 84.A 22.23,42.29 26.92,42.29 85.A 27.3,42.29 32,42.29 86.A 32.38,42.29 37.08,42.29 87.A | 8A.A 52.45,42.29 57.4,42.29 8B.A 57.78,42.29 62.48,42.29 8C.A 62.87,42.29 67.56,42.29 8D.A 67.94,42.29 72.64,42.29 8E.A 73.03,42.29 77.72,42.29 8F.A | 78.K 44.07,39.12 44.07,42.16 88.K | 89.A 47.24,42.29 44.45,42.29 88.K | 98.K 44.2,49.15 44.45,48.9 44.45,42.67 88.K
  Bottom 0.762: 98.K 44.07,49.28 44.07,54.23 A8.K 44.07,54.61 44.07,59.31 B8.K 44.07,59.69 44.07,64.39 C8.K 44.07,64.77 44.07,69.47 D8.K 44.07,69.85 E8.K 44.07,74.93 F8.K | 08.K 44.07,3.56 18.K 44.07,8.89 28.K 44.07,13.97 38.K 44.07,19.05 44.07,23.75 48.K 44.07,24.13 58.K 44.07,29.21 44.07,33.91 68.K 44.07,34.29 44.07,38.99 78.K | 8A.A 52.32,42.29 47.37,42.29 89.A | 87.A 88.K
S10  (1 unrouted)
  Top 0.762: A0.A 1.65,52.45 6.6,52.45 A1.A 6.99,52.45 11.68,52.45 A2.A 12.06,52.45 16.76,52.45 A3.A 17.14,52.45 21.84,52.45 A4.A 22.23,52.45 26.92,52.45 A5.A 27.3,52.45 32,52.45 A6.A 32.38,52.45 37.08,52.45 A7.A 37.47,52.45 42.16,52.45 A8.A 42.55,52.45 47.24,52.45 A9.A | AC.A 62.61,52.45 67.56,52.45 AD.A 67.94,52.45 72.64,52.45 AE.A 73.03,52.45 77.72,52.45 AF.A | 9A.K 54.23,49.28 54.23,52.32 AA.K | AB.A 57.4,52.45 54.61,52.45 AA.K | BA.K 54.36,59.31 54.61,59.05 54.61,52.83 AA.K
  Bottom 0.762: BA.K 54.23,59.44 54.23,64.39 CA.K 54.23,64.77 54.23,69.47 DA.K 54.23,69.85 54.23,74.55 EA.K 54.23,74.93 54.23,79.63 FA.K | 0A.K 54.23,3.56 54.23,8.51 1A.K 54.23,8.89 54.23,13.59 2A.K 54.23,13.97 54.23,18.67 3A.K 54.23,19.05 54.23,23.75 4A.K 54.23,24.13 54.23,28.83 5A.K 54.23,29.21 54.23,33.91 6A.K 54.23,34.29 54.23,38.99 7A.K 54.23,39.37 54.23,44.07 8A.K 54.23,44.45 54.23,49.15 9A.K | AC.A 62.48,52.45 57.53,52.45 AB.A | A9.A 47.37,52.45 54.23,52.45 AA.K
S12  (2 unrouted)
  Top 0.762: C0.A 1.65,62.61 6.6,62.61 C1.A 6.99,62.61 11.68,62.61 C2.A 12.06,62.61 16.76,62.61 C3.A 17.14,62.61 21.84,62.61 C4.A 22.23,62.61 26.92,62.61 C5.A 27.3,62.61 32,62.61 C6.A 32.38,62.61 37.08,62.61 C7.A 37.47,62.61 42.16,62.61 C8.A 42.55,62.61 47.24,62.61 C9.A 47.62,62.61 52.32,62.61 CA.A 52.7,62.61 57.4,62.61 CB.A | CE.A 72.77,62.61 77.72,62.61 CF.A | BC.K 64.39,59.44 64.39,62.48 CC.K | CD.A 67.56,62.61 64.77,62.61 CC.K | DC.K 64.52,69.47 64.77,69.22 64.77,62.99 CC.K
  Bottom 0.762: DC.K 64.39,69.6 64.39,74.55 EC.K 64.39,74.93 64.39,79.63 FC.K | 0C.K 64.39,3.56 64.39,8.51 1C.K 64.39,8.89 64.39,13.59 2C.K 64.39,13.97 64.39,18.67 3C.K 64.39,19.05 64.39,23.75 4C.K 64.39,24.13 64.39,28.83 5C.K 64.39,29.21 64.39,33.91 6C.K 64.39,34.29 64.39,38.99 7C.K 64.39,39.37 64.39,44.07 8C.K 64.39,44.45 64.39,49.15 9C.K 64.39,49.53 64.39,54.23 AC.K 64.39,54.61 64.39,59.31 BC.K | CE.A 72.64,62.61 67.69,62.61 CD.A | CB.A 64.39,62.61 CC.K
S14  (5 unrouted)
  Top 0.762: E0.A 1.65,72.77 6.6,72.77 E1.A 6.99,72.77 11.68,72.77 E2.A 12.06,72.77 16.76,72.77 E3.A 17.14,72.77 21.84,72.77 E4.A 22.23,72.77 26.92,72.77 E5.A 27.3,72.77 32,72.77 E6.A 32.38,72.77 37.08,72.77 E7.A 37.47,72.77 42.16,72.77 E8.A 42.55,72.77 47.24,72.77 E9.A 47.62,72.77 52.32,72.77 EA.A 52.7,72.77 57.4,72.77 EB.A 57.78,72.77 62.48,72.77 EC.A 62.87,72.77 67.56,72.77 ED.A | DE.K 74.55,69.6 74.55,72.64 EE.K | FE.K 74.55,73.03 EE.K | EF.A 77.72,72.77 74.93,72.77 EE.K | 91.19,35.56 IC1.17 | 6E.K 74.55,34.04 74.55,38.99 7E.K
  Bottom 0.762: 0E.K 74.55,3.56 1E.K 74.55,8.89 2E.K 74.55,13.97 3E.K 74.55,19.05 74.55,23.75 4E.K 74.55,24.13 5E.K 74.55,29.21 74.55,33.91 6E.K | 8E.K 74.55,44.45 9E.K 74.55,49.53 74.55,54.23 AE.K 74.55,54.61 74.55,59.31 BE.K 74.55,59.69 74.55,64.39 CE.K 74.55,64.77 74.55,69.47 DE.K | ED.A 67.69,72.77 74.55,72.77 EE.K
VCC  (9 unrouted)
  Bottom 0.762: CP2.1 86.49,11.81 | 83.82,14.48 U$2.P$1